# EAGLE board DVR8825_SHIELD (EAGLE 9.6.2)
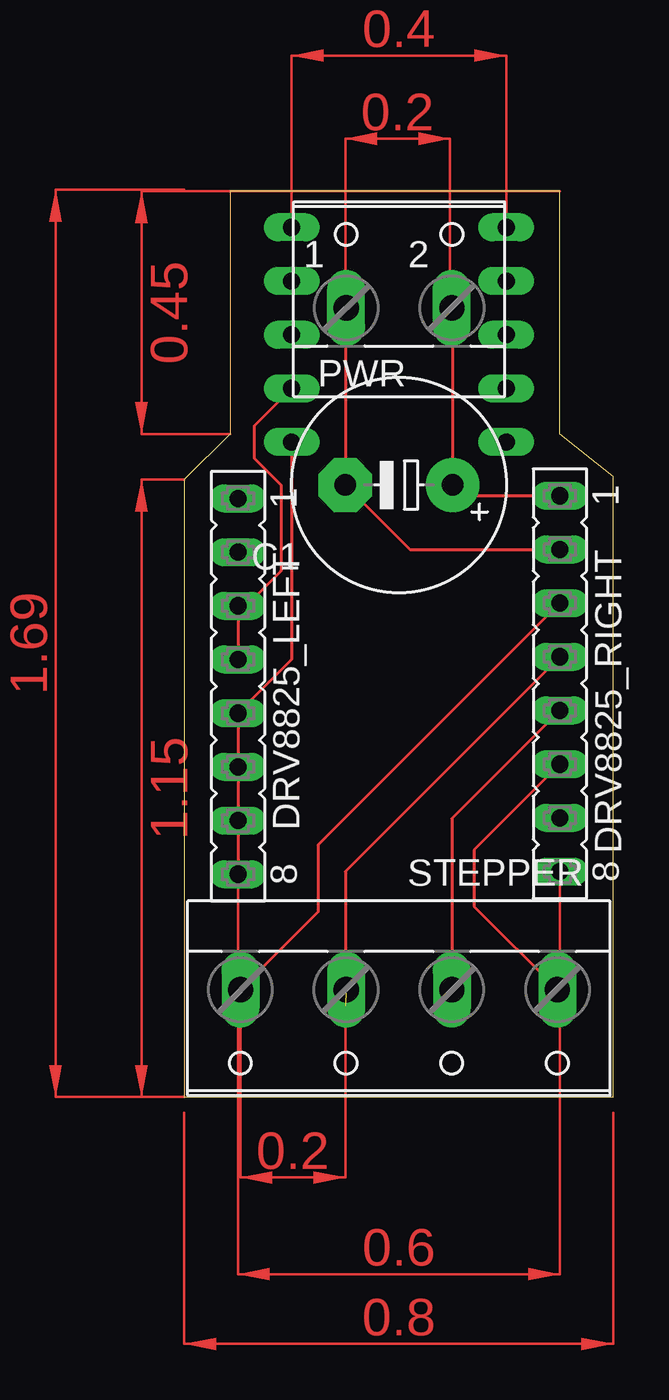
[diagram p0: board, top side]
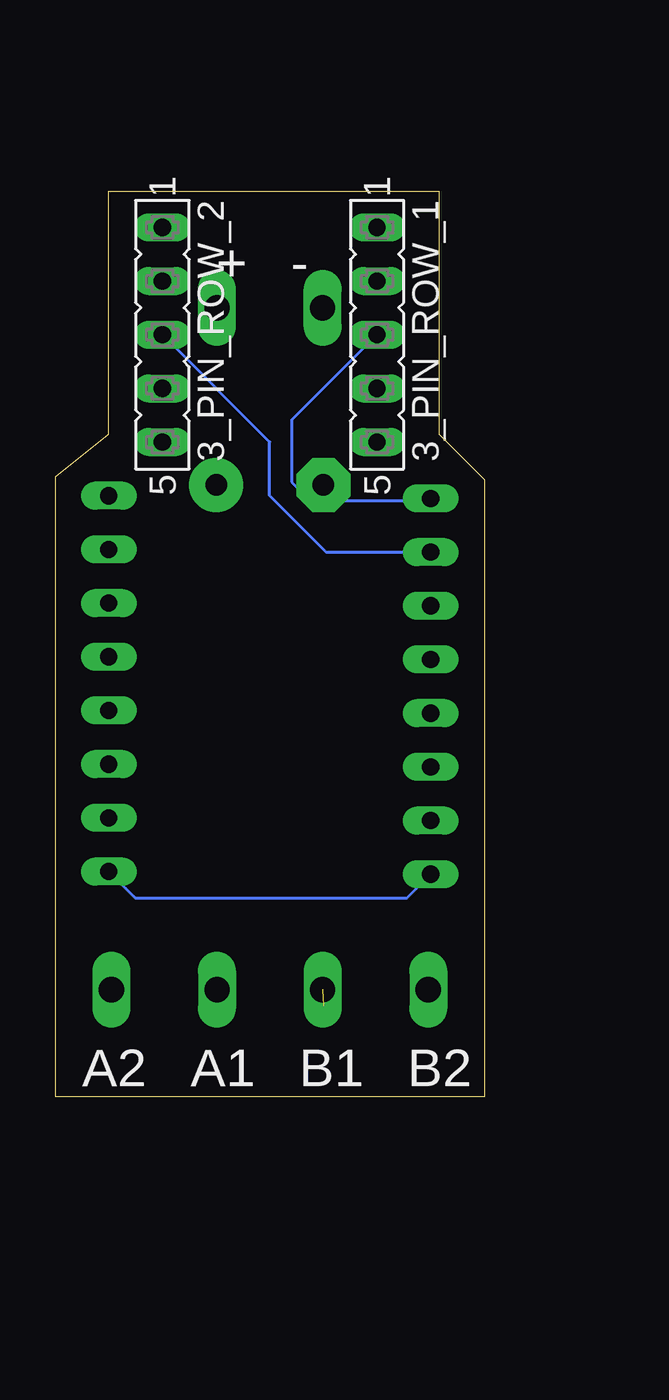
[diagram p1: board, bottom side, seen from below]

Size 20.3 x 42.85 mm. Coordinates in mm from the lower left corner, seen from the top.
Outline: 0,0 20.3,0 20.3,29.36 17.78,31.37 17.78,42.85 2.16,42.85 2.16,31.37 0,29.21 0,0
Copper layers (1*16): Top 0.035mm / dielectric 1.5mm / Bottom 0.035mm
Design rules "default": minimum track width 6mil, minimum drill 0.35mm, track to track 6mil, track to pad 6mil, pad to pad 6mil, via to via 6mil, smd to smd 6mil, copper to edge 40mil, drill to drill 6mil, minimum pad ring 10mil, minimum via ring 8mil, stop-mask expansion 4mil, vias tented up to drill 0mil, thermal gap 10mil

## Footprints (pad centres in the part's own frame; a part is rotated, then mirrored left to right if it is on the bottom)
FE05-1 = drill 0.813 long: 1 -5.08,0; 2 -2.54,0; 3 0,0; 4 2.54,0; 5 5.08,0
E5-10,5 = drill 1.016 pad 2.54: + -2.54,0 | drill 1.016 pad 2.54 octagon: - 2.54,0
FE08 = drill 0.813 long: 1 -8.89,0; 2 -6.35,0; 3 -3.81,0; 4 -1.27,0; 5 1.27,0; 6 3.81,0; 7 6.35,0; 8 8.89,0
W237-102 = drill 1.194 long: 1 -2.5,-1.27; 2 2.5,-1.27
W237-4 = drill 1.194 long: 1 -7.5,-1.27; 2 -2.5,-1.27; 3 2.5,-1.27; 4 7.5,-1.27

## Placement (x,y rotation side)
3_PIN_ROW_1  [FE05-1]  5.08,36.07 270 bottom
3_PIN_ROW_2  [FE05-1]  15.24,36.07 270 bottom
C1  100uF-63V  [E5-10,5]  10.16,28.96 180 top
DRV8825_LEFT  [FE08]  2.54,19.43 270 top
DRV8825_RIGHT  [FE08]  17.78,19.56 270 top
PWR  [W237-102]  10.16,38.61 0 top
STEPPER  [W237-4]  10.16,3.81 180 top

## Library data of the parts
3_PIN_ROW_1 3_PIN_ROW_2 DRV8825_LEFT DRV8825_RIGHT = con-lsta; OC_FARNELL: unknown; OC_NEWARK: unknown
C1 = rcl; SPICEPREFIX: C
PWR = con-wago-500; MPN: 237-102; OC_FARNELL: unknown; OC_NEWARK: 70K9898
STEPPER = con-wago-500; OC_FARNELL: unknown; OC_NEWARK: unknown

## Nets
N$1: DRV8825_RIGHT.3 STEPPER.4
N$2: 3_PIN_ROW_1.5 DRV8825_LEFT.5 DRV8825_LEFT.6 DRV8825_LEFT.7 DRV8825_LEFT.8 DRV8825_RIGHT.8
N$3: 3_PIN_ROW_1.3 DRV8825_LEFT.1
N$4: 3_PIN_ROW_2.3 DRV8825_LEFT.2
N$5: C1.+ DRV8825_RIGHT.1 PWR.2
N$6: C1.- DRV8825_RIGHT.2 PWR.1
N$7: DRV8825_RIGHT.4 STEPPER.3
N$8: 3_PIN_ROW_1.4 DRV8825_LEFT.3 DRV8825_LEFT.4
N$9: DRV8825_RIGHT.5 STEPPER.2
N$10: DRV8825_RIGHT.6 STEPPER.1

## Tracks (layer width: path | path; a pad name or v marks a point on that pad's centre or on a via)
N$1
  Top 0.152: STEPPER.4 6.35,8.77 6.35,11.94 DRV8825_RIGHT.3
N$2
  Top 0.152: 3_PIN_ROW_1.5 5.08,20.7 DRV8825_LEFT.5 DRV8825_LEFT.6 DRV8825_LEFT.7 DRV8825_LEFT.8
  Bottom 0.152: DRV8825_LEFT.8 3.68,9.4 16.51,9.4 DRV8825_RIGHT.8
N$3
  Bottom 0.152: 3_PIN_ROW_1.3 9.12,32.03 9.12,29.1 8.24,28.22 2.64,28.22 DRV8825_LEFT.1
N$4
  Bottom 0.152: 3_PIN_ROW_2.3 10.16,30.99 10.16,28.45 7.49,25.78 DRV8825_LEFT.2
N$5
  Top 0.152: PWR.2 12.7,37.3 C1.+ 13.21,28.45 DRV8825_RIGHT.1
N$6
  Top 0.152: DRV8825_RIGHT.2 10.67,25.91 C1.- 7.62,37.3 PWR.1
N$7  (1 unrouted)
  Top 0.152: DRV8825_RIGHT.4 7.62,10.67 7.62,4.32
N$8
  Top 0.152: 3_PIN_ROW_1.4 3.3,31.75 3.3,30.23 4.57,28.96 4.57,24.89 2.92,23.24 DRV8825_LEFT.3 DRV8825_LEFT.4
N$9
  Top 0.152: STEPPER.2 12.66,13.17 DRV8825_RIGHT.5
N$10
  Top 0.152: DRV8825_RIGHT.6 13.72,11.68 13.72,9.02 STEPPER.1
(copper drawn outside any net)
  shapes: Top area x9

## Text on the board
bNames: + - | A2 A1 B1 B2